# Altium PCB УШЯИ.467444.130_R1.PcbDoc (part 4 of 4)
Units mm, origin at the board's own origin, x right, y up, seen from the top; angles counter-clockwise.
Board outline 280 x 190 mm, 6 copper layers (Top, GND, INT1, INT2, +3.3VB, POWER, Bottom), stack 1.422 mm thick; 240 components, 189 nets, 1128 pads, 331 vias.
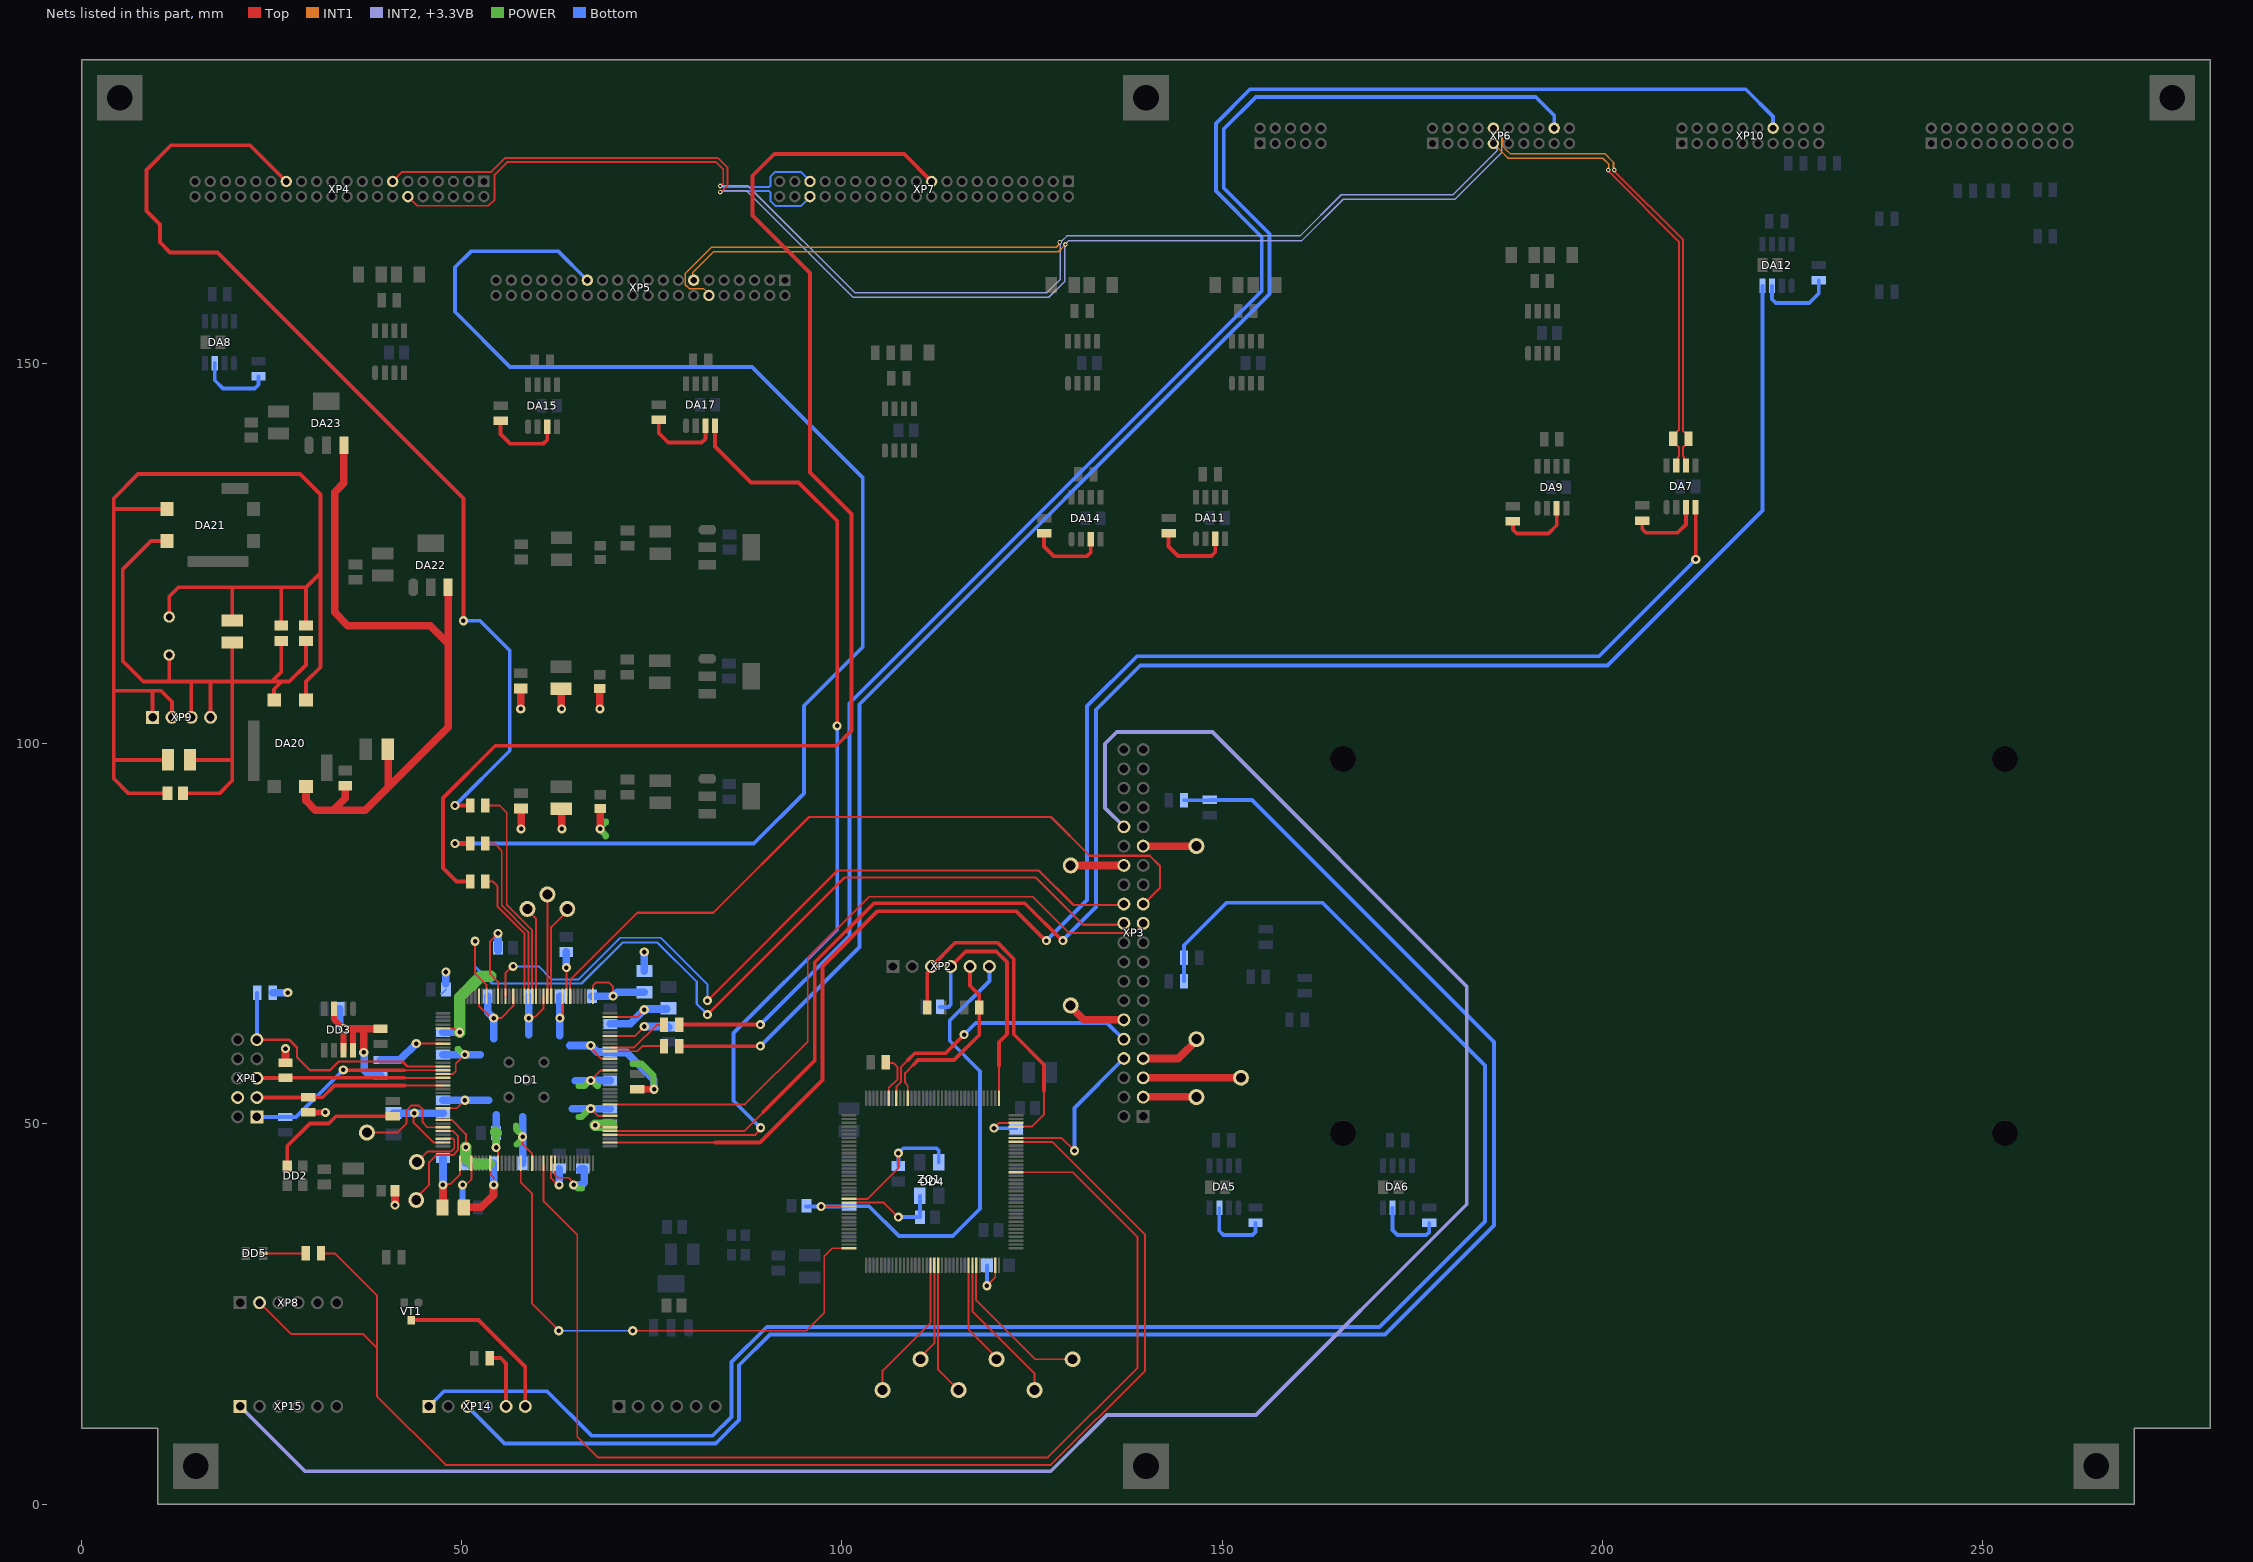
[diagram p8: the nets of this part, all layers, seen from the top]

## Via types
v1: diameter 1.2, hole 0.6, Top to Bottom, tented both sides, 289 vias
v2: diameter 0.6, hole 0.3, Top to Bottom, tented both sides, 42 vias

## Nets (pads, with @x,y where several pads share a name; then routed paths per layer and width w, separated by ;. In a path a pad name is that pad's centre, name@x,y a point inside that pad or via, vN(x,y) a via of type N, cw(c..) or ccw(c..) an arc to the next point about the centre after c; other vN are vias at no path point) (continued)
NetC60_1: C60.1 DD4.24 ZQ1.1 | length 12.9
  Top w0.25: DD4.24@100.924,39.65 105.525,39.65 v1(107.425,37.75)
  Bottom w0.5: v1(107.425,37.75) C60.1@110.25,37.75 110.25,40.525 ZQ1.1@110.225,40.55
NetC61_1: C61.1 DD4.23 ZQ1.3 | length 19.1
  Top w0.25: DD4.23@100.924,40.15 103.375,40.15 107.425,44.2 v1(107.425,46.175)
  Bottom w0.5: C61.1@107.425,44.45 v1(107.425,46.175) 107.443,46.175 108.068,46.8 112.432,46.8 112.725,46.507 ZQ1.3@112.725,44.95
NetC66_+: C66.+ DD4.71 | length 5.8
  Top w0.25: v1(119.075,28.725) 120.162,29.812 DD4.71@120.162,31.412
  Bottom w0.5: v1(119.075,28.725) C66.+@119.075,31.425
NetC67_+: C67.+ DD4.106 | length 6.1
  Top w0.25: v1(120,49.45) 120.7,50.15 DD4.106@122.9,50.15
  Bottom w0.5: v1(120,49.45) C67.+@122.925,49.45
NetC82_1: C82.1 C84.1 C86.+ C87.2 C88.+ C89.+ DA20.1 DA21.1 XP9.1 XP9.2 | length 168.5
  Top w0.5: XP9.1@9.32,103.5 9.32,106.97 9.35,107 ; DA21.1@11.203,130.9 4.2,130.9 ; C87.2@11.3,93.5 6.15,93.5 4.2,95.45 4.2,97.9 4.2,98.1 ; C89.+@11.321,97.9 4.4,97.9 4.2,98.1 ; C86.+@11.5,116.7 11.5,119.4 12.7,120.6 19.8,120.6 ; XP9.2@11.86,103.5 11.86,105.54 10.4,107 9.35,107 ; C88.+@19.8,116.25 19.8,120.6 ; C82.1@26.25,115.563 26.25,120.6 ; DA20.1@29.5,105.8 29.5,108.195 31.4,110.095 31.4,122.5 ; C84.1@29.5,115.563 29.5,120.6 ; 4.2,98.1 4.2,107 ; 4.2,107 4.2,130.9 ; 4.2,107 9.35,107 ; 4.2,130.9 4.2,132.3 7.4,135.5 28.7,135.5 31.4,132.8 31.4,122.5 ; 19.8,120.6 26.25,120.6 ; 26.25,120.6 29.5,120.6 ; 29.5,120.6 31.4,122.5
NetC82_2: C82.2 C84.2 C86.- C87.1 C88.- C89.- DA20.3 DA21.3 XP9.3 XP9.4 | length 100.7
  Top w0.5: DA21.3@11.203,126.7 9.087,126.7 5.4,123.013 5.4,110.878 8.079,108.199 11.597,108.199 ; C86.-@11.5,111.7 11.5,108.296 11.597,108.199 ; C87.1@13.9,93.5 18.1,93.5 19.8,95.2 19.8,97.9 ; C89.-@14.221,97.9 19.8,97.9 ; XP9.3@14.4,103.5 14.4,108.149 ; XP9.4@16.94,103.5 16.94,108.199 ; C88.-@19.8,113.35 19.8,108.199 ; DA20.3@25.3,105.8 25.3,107.2 26.25,108.15 ; C82.2@26.25,113.563 26.25,109.449 25,108.199 ; C84.2@29.5,113.563 29.5,110.4 27.299,108.199 26.25,108.199 25,108.199 ; 11.597,108.199 16.94,108.199 ; 16.94,108.199 19.6,108.199 ; 19.6,108.199 19.8,108.199 ; 19.6,108.199 19.8,107.999 19.8,97.9 ; 19.8,108.199 25,108.199
NetC90_1: C90.1 C91.+ DA20.2 DA22.3 DA23.3 | length 91.9
  Top w1: DA20.2@29.5,94.4 29.5,92.5 30.7,91.3 33.1,91.3 ; DA23.3@34.475,139.3 34.475,134.325 33.275,133.125 33.275,117.3 35.012,115.563 45.837,115.563 48.2,113.2 ; C90.1@34.65,94.5 34.65,92.85 33.1,91.3 ; C91.+@40.293,99.257 40.293,94.293 ; DA22.3@48.2,120.6 48.2,113.2 ; 33.1,91.3 37.3,91.3 40.293,94.293 ; 40.293,94.293 48.2,102.2 48.2,113.2
NetDA5_3: DA5.3 R15.2 | length 9.4
  Bottom w0.5: DA5.3@149.645,38.992 149.645,35.955 150.2,35.4 154.005,35.4 154.405,35.8 R15.2@154.405,37.017
NetDA6_3: DA6.3 R17.2 | length 9.4
  Bottom w0.5: DA6.3@172.435,38.992 172.435,36.035 173.07,35.4 176.875,35.4 177.275,35.8 R17.2@177.275,37.017
NetDA7_3: DA7.3 R19.2 | length 9.8
  Top w0.5: R19.2@205.275,129.375 205.275,128.275 205.775,127.775 209.929,127.775 211.029,128.875 DA7.3@211.029,131.125
NetDA8_3: DA8.3 R20.2 | length 9.8
  Bottom w0.5: DA8.3@17.496,150.1 17.496,147.85 18.596,146.75 22.75,146.75 23.25,147.25 R20.2@23.25,148.35
NetDA9_3: DA9.3 R21.2 | length 9.8
  Top w0.5: R21.2@188.275,129.275 188.275,128.175 188.775,127.675 192.929,127.675 194.029,128.775 DA9.3@194.029,131.025
NetDA11_3: DA11.3 R28.2 | length 10.4
  Top w0.5: R28.2@142.975,127.725 142.975,125.975 144.225,124.725 148.61,124.725 149.11,125.225 DA11.3@149.11,126.975
NetDA12_3: DA12.3 R29.2 | length 10.4
  Bottom w0.5: DA12.3@222.365,160.25 222.365,158.5 222.865,158 227.25,158 228.5,159.25 R29.2@228.5,161
NetDA14_3: DA14.3 R35.2 | length 10.4
  Top w0.5: R35.2@126.6,127.7 126.6,125.95 127.85,124.7 132.235,124.7 132.735,125.2 DA14.3@132.735,126.95
NetDA15_3: DA15.3 R36.2 | length 10.4
  Top w0.5: R36.2@55.1,142.5 55.1,140.75 56.35,139.5 60.735,139.5 61.235,140 DA15.3@61.235,141.75
NetDA17_3: DA17.3 R42.2 | length 10.4
  Top w0.5: R42.2@75.9,142.634 75.9,140.884 77.15,139.634 81.535,139.634 82.035,140.134 DA17.3@82.035,141.884
NetDD1_31: DD1.31 TP5.1 | length 14.7
  Top w0.25: TP5.1@37.505,48.875 41.5,48.875 42.725,50.1 42.725,51.825 43.325,52.425 44.35,52.425 44.825,51.95 44.825,50.225 45.475,49.575 DD1.31@47.512,49.575
NetDD1_32: DD1.32 TP4.1 | length 14.2
  Top w0.25: TP4.1@44,40 44,40.3 45.687,41.987 45.687,44.987 46.619,45.919 48.844,45.919 49.475,46.55 49.475,48.45 48.85,49.075 DD1.32@47.512,49.075
NetDD1_34: DD1.34 TP6.1 | length 8.3
  Top w0.25: TP6.1@44.075,45 45.444,46.369 48.544,46.369 49,46.825 49,47.92 48.854,48.066 47.521,48.066 DD1.34@47.512,48.075
NetDD1_120: DD1.120 TP1.1 | length 12.1
  Top w0.25: DD1.120@61.75,66.813 61.75,75.9 63.375,77.525 63.436,77.525 TP1.1@63.517,77.444 ; TP1.1@63.517,77.8 TP1.1@63.874,78.156
NetDD1_121: DD1.121 TP2.1 | length 13.1
  Top w0.25: TP2.1@61.162,79.888 61.25,79.8 DD1.121@61.25,66.813
NetDD1_124: DD1.124 TP3.1 | length 12
  Top w0.25: TP3.1@58.626,78.3 58.626,78.174 59.75,77.05 DD1.124@59.75,66.813
NetDD2_3: DD2.3 R2.1 | length 18.1
  Top w0.5: DD2.3@27.025,44.487 27.025,47.1 30,50.075 32.485,50.075 33.435,51.025 R2.1@40.9,51.025
NetDD4_54: DD4.54 TP12.1 | length 19
  Top w0.25: TP12.1@105.35,15 105.35,17.55 111.662,23.862 DD4.54@111.662,31.412
NetDD4_55: DD4.55 TP11.1 | length 13.1
  Top w0.25: TP11.1@110.35,19.05 110.35,19.35 112.162,21.162 DD4.55@112.162,31.412
NetDD4_56: DD4.56 TP10.1 | length 17.5
  Top w0.25: DD4.56@112.662,31.412 112.662,17.688 TP10.1@115.35,15
NetDD4_64: DD4.64 TP9.1 | length 13.7
  Top w0.25: DD4.64@116.662,30.742 116.662,22.938 TP9.1@120.796,18.804
NetDD4_65: DD4.65 TP8.1 | length 19.8
  Top w0.25: DD4.65@117.162,31.412 117.162,25.338 125.35,17.15 TP8.1@125.35,15
NetDD4_66: DD4.66 TP7.1 | length 20.5
  Top w0.25: DD4.66@117.662,31.412 117.662,26.838 125.45,19.05 TP7.1@130.35,19.05
NetDD4_138: DD4.138 R10.2 | length 6.4
  Top w0.25: R10.2@105.775,58.1 105.825,58.05 106.75,58.05 107.325,57.475 107.325,55.9 106.162,54.737 DD4.138@106.162,53.388
NetDD5_5: DD5.5 R50.2 | length 5.6
  Top w0.3: DD5.5@23.85,32.975 R50.2@29.475,32.975
NetTP13_1: TP13.1 XP3.3 | length 6.9
  Top w1: XP3.3@139.692,53.6 TP13.1@146.568,53.6
NetTP14_1: TP14.1 XP3.5 | length 12.9
  Top w1: XP3.5@139.78,56.1 TP14.1@152.65,56.1
NetTP15_1: TP15.1 XP3.7 | length 8.3
  Top w1: XP3.7@139.577,58.618 144.26,58.618 TP15.1@146.8,61.158
NetTP16_1: TP16.1 XP3.29 | length 7.2
  Top w1: XP3.29@139.655,86.556 TP16.1@146.825,86.556
NetTP17_1: TP17.1 XP3.12 | length 7.7
  Top w1: TP17.1@130.09,65.435 131.827,63.698 XP3.12@137.09,63.698
NetTP18_1: TP18.1 XP3.28 | length 7.1
  Top w1: TP18.1@130.025,83.953 130.072,84 XP3.28@137.09,84
NRST: C57.2 DD4.25 R14.2 XP2.6 | length 65.3
  Top w0.25: v1(97.25,39.15) DD4.25@100.924,39.15
  Bottom w0.5: C57.2@95.275,39.15 v1(97.25,39.15) 97.263,39.162 R14.2@100.813,39.162 ; R14.2@100.95,39.175 103.575,39.175 107.5,35.25 114.575,35.25 118.175,38.85 118.175,56.95 114.175,60.95 114.175,63.6 119.395,68.82 XP2.6@119.395,70.725
NSTAT: DD1.9 R6.1 | length 9.1
  Top w0.25: v1(44,60.575) DD1.9@47.512,60.575
  Bottom w1: R6.1@39.3,58.425 41.85,58.425 v1(44,60.575)
OVLB: R69.1 XP4.27 | length 135
  Top w0.5: XP4.27@26.9,174 22.15,178.75 11.75,178.75 8.5,175.5 8.5,170.1 10.275,168.325 10.275,166 11.625,164.65 17.85,164.65 50.2,132.3 v1(50.2,116.2) ; v1(49.098,91.9) R69.1@51.098,91.9
  Bottom w0.5: v1(49.098,91.9) 56.3,99.102 56.3,112.3 52.4,116.2 v1(50.2,116.2)
OVLBR: DD1.125 R69.2 | length 28.7
  Top w0.25: R69.2@53.098,91.9 54.975,91.9 55.9,90.975 55.9,78.825 59.25,75.475 DD1.125@59.25,66.813
OVLI_1: R71.1 XP6.18 | length 209.5
  Top w0.5: R71.1@78.6,60.239 v1(89.275,60.239)
  Bottom w0.5: v1(89.275,60.239) 102.3,73.264 102.3,105.225 156.25,159.175 156.25,167.125 150.225,173.15 150.225,180.875 154.45,185.1 191.275,185.1 193.7,182.675 XP6.18@193.7,181
OVLI_1R: DD1.98 R71.2 | length 7.4
  Top w0.25: DD1.98@69.488,59.575 73.078,59.575 73.743,60.239 R71.2@76.6,60.239
OVLI_2: R73.1 XP10.14 | length 237.3
  Top w0.5: R73.1@78.502,63 78.577,63.075 v1(89.275,63.075)
  Bottom w0.5: v1(89.275,63.075) 100.975,74.775 100.975,105.35 155.225,159.6 155.225,166.7 149.2,172.725 149.2,181.625 153.7,186.125 218.9,186.125 222.5,182.525 XP10.14@222.5,181
OVLI_2R: DD1.99 R73.2 | length 8.4
  Top w0.25: DD1.99@69.488,60.075 72.675,60.075 75.621,63.021 76.546,63.021 R73.2@76.6,63.075
OVLP: R70.1 XP5.27 | length 183.7
  Top w0.5: v1(49.1,86.9) R70.1@51.1,86.9
  Bottom w0.5: v1(49.1,86.9) 88.4,86.9 95,93.5 95,105.025 102.75,112.775 102.75,135 88.15,149.6 56.35,149.6 49.1,156.85 49.1,162.7 51.2,164.8 62.7,164.8 XP5.27@66.5,161
OVLPR: DD1.126 R70.2 | length 23.1
  Top w0.25: R70.2@53.1,86.9 54.3,86.9 55.25,85.95 55.25,78.757 58.75,75.257 DD1.126@58.75,66.813
OVLW: R72.1 XP7.19 | length 175.7
  Top w0.5: R72.1@51.231,81.9 49.3,81.9 47.512,83.688 47.512,92.864 54.398,99.75 99.25,99.75 101.25,101.75 101.25,130.25 95.8,135.7 95.8,161.95 88.25,169.5 88.25,174.75 91.1,177.6 108.2,177.6 XP7.19@111.8,174
OVLWR: DD1.127 R72.2 | length 17.8
  Top w0.25: R72.2@53.098,81.9 54.1,81.9 54.7,81.3 54.7,78.6 58.25,75.05 DD1.127@58.25,66.813
PULSB: DA17.4 DD1.76 | length 130.2
  Top w0.25: DD1.76@69.488,48.575 88.619,48.575 89.3,49.256 v1(89.3,49.5)
  Top w0.5: DA17.4@83.305,141.884 83.305,139.12 88.025,134.4 94.3,134.4 99.375,129.325 v1(99.375,102.375)
  Bottom w0.5: v1(89.3,49.5) 85.75,53.05 85.75,61.95 99.375,75.575 v1(99.375,102.375)
PULSC: DA12.4 DD1.77 | length 241.9
  Top w0.25: DD1.77@69.488,49.075 87.15,49.075 89.65,51.575
  Top w0.5: 89.65,51.575 96.425,58.35 96.425,71.275 104.2,79.05 124.05,79.05 128.975,74.125 v1(129.075,74.125)
  Bottom w0.5: v1(129.075,74.125) 129.075,74.2 133.425,78.55 133.425,104.488 139.237,110.3 200.7,110.3 221.095,130.695 DA12.4@221.095,160.25
RUN_ADC: DA7.4 DD1.74 | length 208.4
  Top w0.25: DD1.74@69.488,47.575 83.375,47.575
  Top w0.5: 83.375,47.575 89.2,47.575 97.425,55.8 97.425,70.725 104.7,78 122.9,78 126.775,74.125 v1(126.9,74.125) ; DA7.4@212.299,131.125 212.312,131.112 212.312,124.288 v1(212.325,124.275)
  Bottom w0.5: v1(126.9,74.125) 132.25,79.475 132.25,104.975 138.8,111.525 199.575,111.525 v1(212.325,124.275)
RUN_n: DA7.7 R24.1 XP4.12 XP5.12 XP6.9 XP7.35 | length 299.8
  Top w0.25: XP4.12@42.9,172 44.1,170.8 53.478,170.8 54.295,171.617 54.295,174.89 55.945,176.539 83.461,176.539 84.383,175.617 84.383,173.783 v2(84,173.4) ; v2(200.8,175.5) 200.8,175.405 201.21,174.995 201.21,174.978 210.1,166.088 210.1,141.3 209.375,140.575 R24.1@209.375,140.175 209.375,139.775 210.1,139.05 210.1,137.875 209.994,137.769 209.994,136.861 DA7.7@209.759,136.625
  INT1 w0.2: XP5.12@82.5,159 82.5,159.2 81.8,159.9 79.9,159.9 79.4,160.4 79.4,161.9 79.893,162.393 80.499,162.999 82.674,165.174 82.85,165.35 128.201,165.35 128.518,165.667 128.518,165.741 128.651,165.874 v2(128.651,165.982) ; XP6.9@185.7,179 187.291,177.409 187.643,177.057 200.091,177.057 200.9,176.249 200.9,175.817 200.877,175.794 200.877,175.577 v2(200.8,175.5)
  INT2, +3.3VB w0.2: v2(84,173.4) 87.65,173.4 88.001,173.049 101.7,159.35 126.969,159.35 128.738,161.119 128.738,165.665 128.728,165.675 128.728,165.906 v2(128.651,165.982) 128.76,165.982 128.93,166.152 129.603,166.825 160.271,166.825 165.696,172.25 180.4,172.25 186.2,178.05 186.2,178.233 185.7,178.733 XP6.9@185.7,179
  Bottom w0.25: v2(84,173.4) 84.067,173.333 84.263,173.333 84.321,173.275 90.432,173.275 90.579,173.421 90.579,174.604 91.225,175.25 94.55,175.25 XP7.35@95.8,174
RUN_p: DA7.6 R24.2 XP4.13 XP5.13 XP6.10 XP7.36 | length 300.8
  Top w0.25: XP4.13@40.9,174 42.15,175.25 53.878,175.25 55.717,177.089 83.689,177.089 84.933,175.844 84.933,173.45 84.084,172.6 v2(84,172.6) ; v2(201.6,175.5) 201.6,175.405 201.76,175.245 201.76,175.206 210.65,166.316 210.65,165.15 210.65,141.146 210.796,141 210.95,141 211.375,140.575 R24.2@211.375,140.175 211.375,139.775 210.65,139.05 210.65,137.85 210.762,137.738 210.762,136.892 DA7.6@211.029,136.625
  INT1 w0.2: XP5.13@80.5,161 80.4,161.1 80.4,162.051 83.099,164.75 128.45,164.75 v2(129.4,165.7) ; XP6.10@185.7,181 185.7,180.919 186.95,179.669 186.95,178.599 187.467,178.081 187.891,177.657 200.34,177.657 201.5,176.497 201.5,175.817 201.523,175.794 201.523,175.577 v2(201.6,175.5)
  INT2, +3.3VB w0.2: v2(84,172.6) 84.108,172.6 84.308,172.8 87.401,172.8 101.451,158.75 127.218,158.75 129.338,160.871 129.338,165.638 v2(129.4,165.7) ; v2@129.4,165.774 129.851,166.225 160.519,166.225 165.944,171.65 180.649,171.65 186.8,177.801 186.8,179.819 185.7,180.919 XP6.10@185.7,181
  Bottom w0.25: v2(84,172.6) 84.067,172.667 84.263,172.667 84.321,172.725 90.432,172.725 90.579,172.579 90.579,171.471 91.3,170.75 94.55,170.75 XP7.36@95.8,172
RX: DD4.136 XP3.10 | length 37
  Top w0.25: DD4.136@107.162,53.388 107.162,54.925 107.775,55.538 107.775,57.5 108.675,58.4
  Top w0.5: 108.675,58.4 109.575,59.3 113.625,59.3 v1(116.075,61.75)
  Bottom w0.5: v1(116.075,61.75) 117.6,63.275 134.89,63.275 XP3.10@137.09,61.075
SPI_CLK: DD1.115 XP3.23 | length 97.3
  Top w0.25: DD1.115@64.25,66.813 64.25,68.95 73.1,77.8
  Top w0.3: 73.1,77.8 83.075,77.8 95.65,90.375 127.5,90.375 132.6,85.275 140.5,85.275 141.85,83.925 141.85,81.073 XP3.23@139.577,78.8
SPI_MISO: DD1.84 XP3.21 | length 90.4
  Top w0.25: DD1.84@69.488,52.575 87.226,52.575 95.5,60.849 95.5,71.8 103.6,79.9 125.125,79.9 129.9,75.125 138.357,75.125 XP3.21@139.63,76.398
SPICS: DD1.132 XP3.24 | length 101.6
  Top w0.25: DD1.132@55.75,66.813 55.75,69.875 56.6,70.725 v1(56.75,70.725)
  Top w0.3: v1(82.3,66.225) 99.425,83.35 125.9,83.35 130.45,78.8 XP3.24@137.275,78.8
  Bottom w0.25: v1(56.75,70.725) 60.084,70.725 61.809,69 65.337,69 70.837,74.5 76.181,74.5 82.3,68.381 v1(82.3,66.225)
ST_EXT: XP3.32 XP15.1 | length 282.1
  INT2, +3.3VB w0.5: XP15.1@20.84,12.85 29.365,4.325 127.475,4.325 134.85,11.7 154.463,11.7 182.2,39.437 182.2,68.1 148.75,101.55 136.15,101.55 134.625,100.025 134.625,91.563 XP3.32@137.09,89.098
ST_TB: DD1.53 DD4.36 | length 71
  Top w0.25: DD1.53@57.75,44.837 57.75,42.35 59.25,40.85 59.25,26.35 62.75,22.85 v1(62.75,22.8) ; v1(72.475,22.8) 95.3,22.8 97.675,25.175 97.675,32.625 98.7,33.65 DD4.36@100.924,33.65
  Bottom w0.25: v1@62.85,22.8 v1(72.475,22.8)
START: R55.2 R58.1 XP14.1 | length 234.3
  Bottom w0.5: XP14.1@45.65,12.85 47.65,14.85 61.2,14.85 67.05,9 83.011,9 85.475,11.464 85.475,18.675 90.1,23.3 149.642,23.3 ; R58.1@145,68.778 145.018,68.795 145.018,71.883 145.018,73.517 150.6,79.1 163.2,79.1 184.6,57.7 184.6,37.164 170.736,23.3 149.642,23.3 ; 149.513,23.3 149.642,23.3
STOP: R56.2 R59.1 XP14.3 | length 231.8
  Bottom w0.5: XP14.3@50.535,13.045 XP14.3@50.73,12.85 55.605,7.975 83.4,7.975 86.475,11.05 86.475,18.261 90.514,22.3 149.642,22.3 ; R59.1@145,92.6 147.516,92.6 148.362,92.6 R56.2@148.4,92.638 153.962,92.638 185.8,60.8 185.8,36.667 171.433,22.3 149.642,22.3 ; 149.446,22.3 149.642,22.3
Stop_TB: DD1.137 XP3.22 | length 115.4
  Top w0.25: v1(51.738,74.043) 51.738,69.787 53.25,68.275 DD1.137@53.25,66.813
  Top w0.3: v1(82.3,64.4) 100.325,82.425 125.5,82.425 131.7,76.225 XP3.22@137.09,76.225
  Bottom w0.3: v1(51.738,74.043) 51.738,70.717 53.979,68.475 65.75,68.475 71.156,73.881 75.719,73.881 80.9,68.7 80.9,65.8 v1(82.3,64.4)
SWCLK: DD4.109 R11.2 XP2.4 | length 33.7
  Top w0.25: DD4.109@120.662,53.388 120.662,57.662
  Top w0.5: XP2.4@114.315,70.725 116.29,72.7 120.3,72.7 121.7,71.3 121.7,61.8 120.662,60.762 120.662,57.662
  Bottom w0.5: R11.2@112.9,65.4 114,65.4 114.315,65.715 XP2.4@114.315,70.725
SWDIO: DD4.105 R13.2 XP2.3 | length 45.1
  Top w0.25: DD4.105@122.9,49.65 124.95,49.65 126.6,51.3 126.6,54.4
  Top w0.5: R13.2@111.225,65.325 111.225,69.85 111.775,70.4 XP2.3@111.775,70.725 114.906,73.856 120.444,73.856 122.6,71.7 122.6,61.8 126.6,57.8 126.6,54.4
TCK1: DD1.16 R7.1 XP1.1 | length 27
  Top w0.25: 42.4,57.075 DD1.16@47.512,57.075
  Top w0.5: v1(34.4,57.125) 34.45,57.075 42.4,57.075
  Bottom w0.5: XP1.1@23.056,50.925 28.2,50.925 31.633,54.358 v1(34.4,57.125)
TDI: DD1.15 R3.1 XP1.9 | length 33.8
  Top w0.25: 42.85,57.575 DD1.15@47.512,57.575
  Top w0.3: XP1.9@23.04,61.101 27.274,61.101 28.3,60.075 28.3,58.795 30.02,57.075 32.665,57.075 33.815,58.225 42.2,58.225 42.85,57.575
  Bottom w0.25: R3.1@23.04,67.215 R3.1@23.1,67.275
  Bottom w0.5: XP1.9@23.04,61.101 R3.1@23.04,67.215
TDO1: DD1.20 R4.1 XP1.3 | length 25.1
  Top w0.25: 42.45,55.075 DD1.20@47.512,55.075
  Top w0.5: XP1.3@23.04,53.481 23.062,53.503 29.778,53.503 R4.1@29.8,53.525 31.7,53.525 33.25,55.075 42.45,55.075
TMS1: DD1.18 R5.1 XP1.5 | length 24.5
  Top w0.25: 42.4,56.075 DD1.18@47.512,56.075
  Top w0.5: XP1.5@23.04,56.021 23.067,56.048 26.773,56.048 R5.1@26.8,56.075 42.4,56.075
TRACEWO: DD4.133 R12.2 XP2.5 | length 24.8
  Top w0.25: DD4.133@108.662,53.388 108.662,55.063 108.3,55.425 108.3,56.688 109.4,57.788
  Top w0.5: 109.4,57.788 110.012,58.4 114.725,58.4 118.075,61.75 R12.2@118.075,65.325 118.075,66.975 116.855,68.195 XP2.5@116.855,70.725
TX: DD4.102 XP3.8 | length 23.2
  Top w0.25: DD4.102@122.9,48.15 128.921,48.15 v1(130.596,46.475)
  Bottom w0.5: v1(130.596,46.475) 130.596,52.124 137.05,58.578 XP3.8@137.05,58.65
VBUS: DD4.101 R50.1 XP8.2 | length 191.3
  Top w0.25: XP8.2@22.96,26.92 27.53,22.35 37,22.35 38.85,20.5 ; R50.1@31.475,32.975 33.25,32.975 38.85,27.375 38.85,20.5 ; DD4.101@122.9,47.65 127.675,47.65 139.875,35.45 139.875,17.525 127.5,5.15 47.85,5.15 38.85,14.15 38.85,20.5
VCC_PL1: C8.2 DD1.37 L4.2 | length 10.7
  Top w0.25: L4.2@47.462,39.025 L4.2@47.512,39.075 ; v1@47.512,41.549 v1@47.781,41.818 ; v1(47.512,42) 47.612,42.1 48.5,42.1 49.75,43.35 DD1.37@49.75,44.837
  Top w1: L4.2@47.512,39.075 v1@47.512,41.549
  Bottom w1: v1(47.512,42) C8.2@47.512,45.525
VCC_PL2: C9.2 DD1.109 L5.2 | length 12.7
  Top w0.25: DD1.109@67.25,66.813 67.25,68.175 67.7,68.625 69.342,68.625 69.9,68.067 v1(69.9,66.825)
  Bottom w1: C9.2@67.1,66.825 v1(69.9,66.825) ; v1@69.938,66.863 69.992,66.863 70.454,67.325 L5.2@74,67.325
VCCA1: C6.2 DD1.35 L1.2 | length 12.8
  Top w0.25: v1(43.75,51.425) 43.625,51.3 43.625,50.2 46.25,47.575 DD1.35@47.512,47.575
  Bottom w1: L1.2@41,51.425 v1(43.75,51.425) C6.2@47.512,51.425
VCCA2: C7.2 DD1.107 L3.2 | length 13.5
  Top w0.25: DD1.107@69.488,64.075 73.05,64.075 v1(74,65.025)
  Bottom w0.25: v1(74,65.025) v1@74.1,65.125 ; L3.2@76.937,65.125 L3.2@77.2,65.388
  Bottom w1: C7.2@69.5,63.175 72.15,63.175 v1(74,65.025) ; v1@74.1,65.125 L3.2@76.937,65.125
VCCIO: C4.2 C5.2 C17.2 C18.2 C19.2 C20.2 C21.2 C22.2 C23.2 C24.2 C39.2 C40.+ C41.2 C42.2 C43.2 C44.2 DD1.17 DD1.26 DD1.40 DD1.47 DD1.56 DD1.62 DD1.81 DD1.93 DD1.96 DD1.117 DD1.122 DD1.130 DD1.139 DD3.3 DD3.7 DD3.8 L2.2 L8.1 R3.2 R4.2 R5.2 R6.2 R8.2 R9.2 XP1.4 | length 181.3
  Top w0.25: DD1.26@47.512,52.075 49.35,52.075 v1(50.4,53.125) ; DD1.17@47.512,56.575 48.825,56.575 49.2,56.95 49.2,57.925 v1(50.4,59.125) ; v1@50.1,41.549 51.25,42.699 DD1.40@51.25,44.837 ; DD1.139@52.25,66.813 52.25,65.575 53.718,64.107 54.018,64.107 v1(54.2,63.925) 55.171,63.925 56.775,65.529 56.775,66.788 DD1.130@56.75,66.813 ; v1(54.5,46.913) 54.5,46.655 54.75,46.405 DD1.47@54.75,44.837 ; v1@58,48.525 v1(58,48.325) 58,47.325 59.25,46.075 DD1.56@59.25,44.837 ; v1@58.8,63.821 59.085,64.107 59.657,64.107 60.725,65.175 60.725,65.815 60.725,66.788 DD1.122@60.75,66.813 ; DD1.62@62.25,44.837 62.25,43.325 62.65,42.925 64.05,42.925 64.398,42.577 64.398,42.559 64.7,42.257 v1(64.7,42) ; v1@62.718,64.107 v1(62.9,63.925) 62.9,64.182 63.25,64.532 DD1.117@63.25,66.813 ; v1(66.95,52.025) 67.9,51.075 DD1.81@69.488,51.075 ; v1(66.95,55.725) 68.275,57.05 69.463,57.05 DD1.93@69.488,57.075 ; v1(66.95,60.325) 67.132,60.143 67.132,59.822 68.353,58.6 69.463,58.6 DD1.96@69.488,58.575
  Top w0.8: R4.2@29.8,51.525 v1(32.05,51.525) ; DD3.3@33.165,65.175 33.165,63.795 v1(34.435,62.525) DD3.7@34.435,59.675 ; DD3.8@35.705,59.675 35.705,62.525 ; R9.2@73.05,54.575 v1(75.3,54.575)
  Top w1: R5.2@26.8,58.075 v1(26.8,59.925) ; v1(34.435,62.525) 35.705,62.525 37.1,62.525 ; v1(37.1,59.425) 37.1,62.525 ; R8.2@38.8,62.525 37.1,62.525 ; v1(41.2,39.325) L8.1@41.2,41.225 ; v1(57.79,88.816) C39.2@57.79,91.516 ; v1(63.164,88.816) 63.127,88.853 63.127,91.404 C40.+@63.164,91.441 ; v1(68.19,88.816) L2.2@68.19,91.516
  POWER w0.8: 49.44,59.862 49.555,59.862 50.292,59.125 v1(50.4,59.125) ; 57.1,49.767 57.1,49.333 58,48.433 58,48.217 57.8,48.017 57.8,47.921 57.202,47.323 ; v1(64.7,42) 64.808,42 65.271,41.537 65.818,41.537 ; 65.342,54.986 66.103,54.986 66.842,55.725 v1(66.95,55.725) 67.058,55.725 67.795,54.988 67.91,54.988 ; 65.347,50.91 65.727,50.91 66.842,52.025 v1(66.95,52.025) ; 68.927,87.856 68.927,87.971 68.19,88.708 v1(68.19,88.816) 68.19,88.924 68.927,89.661 68.927,89.776 ; 72.421,57.925 73.642,57.925 75.223,56.343 75.223,54.652 v1(75.3,54.575)
  POWER w1: v1(54.5,46.913) 54.5,48.862
  POWER w1.5: 54.437,48.925 54.5,48.862
  Bottom w0.25: 47.249,67.162 47.375,67.162 47.9,67.687 C4.2@47.9,67.7 ; C4.2@47.9,68.475 47.924,68.451 C4.2@48,68.451 ; C24.2@69.454,59.471 C24.2@69.5,59.425
  Bottom w0.8: C19.2@50.1,39.025 v1@50.1,41.943
  Bottom w1: R3.2@25.1,67.275 v1(27.1,67.275) ; C44.2@33.9,65.175 33.9,63.114 34.435,62.579 v1(34.435,62.525) ; v1(37.1,59.425) v1@37.138,59.387 ; v1@37.138,59.087 37.138,57.056 37.724,56.47 39.255,56.47 R6.2@39.3,56.425 ; C17.2@47.512,53.125 v1(50.4,53.125) 53.554,53.125 ; C20.2@47.512,59.125 v1(50.4,59.125) 52.4,59.125 ; C4.2@47.9,68.475 v1(47.9,70) ; C21.2@53.4,66.825 53.4,64.725 v1(54.2,63.925) 54.2,61.195 ; v1(54.5,46.913) C18.2@54.5,48.825 54.5,51.225 ; C41.2@58,44.825 v1(58,48.325) 58,50.931 ; 58.8,61.755 v1(58.8,63.925) C22.2@58.8,66.825 ; 62.9,61.63 v1(62.9,63.925) C23.2@62.9,66.825 ; 64.222,60.325 v1(66.95,60.325) 67.804,59.471 C24.2@69.454,59.471 ; 64.55,52.025 v1(66.95,52.025) C43.2@69.488,52.025 ; v1(64.7,42) 65.85,42 66.1,42.25 C5.2@66.1,44.125 ; 64.9,55.687 66.912,55.687 v1(66.95,55.725) C42.2@69.5,55.725 ; C5.2@65.527,43.975 65.677,44.125 C5.2@65.9,44.125 ; C24.2@69.5,59.425 69.877,59.425 69.9,59.402 71.698,59.402 75.262,55.838 75.262,54.613 v1(75.3,54.575)
  other v1: 50.1,42
VCINT: C29.2 C30.+ C31.2 C32.2 C33.2 C34.2 C35.2 C36.2 C37.2 C38.2 DD1.5 DD1.29 DD1.45 DD1.61 DD1.78 DD1.102 DD1.116 DD1.134 L4.1 L5.1 L7.2 | length 86.9
  Top w0.25: DD1.29@47.512,50.575 47.537,50.55 48.647,50.55 50.525,48.672 v1(50.525,46.967) ; DD1.5@47.512,62.575 48.943,62.575 49.443,62.075 v1(49.7,62.075) ; DD1.45@53.75,44.837 53.75,43.375 54.2,42.925 v1(54.2,42) ; v1@54.099,42.326 54.099,41.65 v1@54.2,41.549 ; DD1.134@54.75,66.813 54.75,68.725 53.718,69.757 53.718,74.043 v1(54.75,75.075) ; DD1.61@61.75,44.837 61.75,42.875 62.625,42 v1(62.8,42) ; DD1.116@63.75,66.813 v1(63.75,70.575) ; v1(67.55,49.825) 67.807,49.825 68.057,49.575 DD1.78@69.488,49.575 ; DD1.102@69.488,61.575 72.75,61.575 v1(74,62.825)
  Top w1: L4.1@50.262,39.025 52.562,39.025 54.162,40.625 54.162,41.511 v1@54.2,41.549 ; v1(57.75,104.6) C29.2@57.75,107.3 ; v1(63.124,104.6) 63.087,104.637 63.087,107.188 C30.+@63.124,107.225 ; v1(68.15,104.6) L7.2@68.15,107.3
  POWER w1.5: v1(49.7,62.075) 49.7,66.65 52.489,69.439 53.796,69.439 53.82,69.463 ; v1(50.525,46.967) 50.525,45.536 51.324,44.738 53.634,44.738 ; v1(67.55,49.825) 69.692,49.825 69.75,49.767
  Bottom w1: C35.2@47.512,62.075 v1(49.7,62.075) ; C34.2@50.5,44.825 50.512,44.838 50.512,46.955 v1(50.525,46.967) ; v1(54.2,42) C31.2@54.2,44.825 ; C36.2@54.75,72.825 v1(54.75,75.075) ; v1(62.8,42) C33.2@62.8,44.125 ; v1(63.75,70.575) C37.2@63.75,72.625 ; v1(67.55,49.825) C32.2@69.5,49.825 ; v1(74,62.825) 77.1,62.825 C38.2@77.2,62.725 ; L5.1@74,70.125 v1(74,72.625)
VD+: R60.1 XP14.5 | length 8.1
  Top w0.5: R60.1@53.65,19.2 55.125,19.2 55.81,18.515 XP14.5@55.81,12.85
VD-: VT1.D XP14.6 | length 22.7
  Top w0.5: VT1.D@43.35,24.2 52.175,24.2 58.35,18.025 XP14.6@58.35,12.85
WR_RG: DD1.59 DD4.93 | length 154.2
  Top w0.25: DD1.59@60.75,44.837 60.75,39.825 65.175,35.4 65.175,8.868 67.893,6.15 127.107,6.15 138.9,17.943 138.9,35.103 130.353,43.65 DD4.93@122.9,43.65
pads on no net: A1.0 DA5.1 DA5.2 DA6.1 DA6.2 DA7.1 DA7.2 DA8.1 DA8.2 DA9.1 DA9.2 DA10.3 DA10.4 DA11.1 DA11.2 DA12.1 DA12.2 DA13.3 DA13.4 DA14.1 DA14.2 DA15.1 DA15.2 DA16.3 DA16.4 DA17.1 DA17.2 DA18.3 DA18.4 DA19.3 DA19.4 DD1.1 DD1.2 DD1.3 DD1.4 DD1.7 DD1.10 DD1.11 DD1.22 DD1.23 DD1.28 DD1.30 DD1.33 DD1.38 DD1.39 DD1.42 DD1.43 DD1.44 DD1.46 DD1.50 DD1.51 DD1.52 DD1.54 DD1.55 DD1.64 DD1.65 DD1.66 DD1.67 DD1.68 DD1.79 DD1.85 DD1.86 DD1.87 DD1.88 DD1.89 DD1.90 DD1.91 DD1.100 DD1.101 DD1.103 DD1.105 DD1.106 DD1.112 DD1.113 DD1.114 DD1.128 DD1.129 DD1.135 DD1.141 DD1.142 DD1.143 DD1.144 DD2.1 DD4.1 DD4.2 DD4.3 DD4.4 DD4.5 DD4.7 DD4.8 DD4.13 DD4.14 DD4.18 DD4.32 DD4.34 DD4.35 DD4.37 DD4.40 DD4.41 DD4.42 DD4.43 DD4.45 DD4.46 DD4.47 DD4.48 DD4.53 DD4.58 DD4.59 DD4.60 DD4.63 DD4.67 DD4.68 DD4.69 DD4.70 DD4.73 DD4.74 DD4.75 DD4.79 DD4.85 DD4.86 DD4.87 DD4.88 DD4.96 DD4.98 DD4.99 DD4.100 DD4.110 DD4.111 DD4.112 DD4.113 DD4.114 DD4.115 DD4.116 DD4.117 DD4.118 DD4.119 DD4.122 DD4.123 DD4.124 DD4.125 DD4.126 DD4.127 DD4.128 DD4.129 DD4.132 DD4.134 DD4.135 DD4.137 DD4.139 DD4.141 DD4.142 XP1.6 XP1.7 XP1.8 XP3.1 XP3.2 XP3.4 XP3.17 XP3.19 XP3.38 XP3.40 XP4.31 XP4.32 XP4.33 XP4.34 XP4.35 XP4.36 XP4.37 XP4.38 XP4.39 XP4.40 XP5.22 XP5.24 XP5.25 XP5.29 XP5.31 XP5.32 XP5.33 XP5.34 XP5.35 XP5.36 XP5.37 XP5.38 XP5.39 XP5.40 XP7.21 XP7.22 XP7.23 XP7.24 XP7.25 XP7.39 XP7.40 XP11.4 XP12.14 XP12.16 XP12.17 XP12.18 XP12.19 XP12.20 ZQ1.2 ZQ1.4

## Polygon pours and split planes (outlines as drawn)
GND on Bottom "GND2" (hatched 45Degree grid 0.5 track 0.2, remove dead copper, pour order 30): -0.05,0 43.8,0 43.8,0.113 125.575,0.113 278.65,0.113 278.65,166.987 278.65,180.762 271.375,180.762 269.2,178.587 269.2,166.987 232.05,166.987 232.05,139.362 200.35,107.662 138.9,107.662 125.575,94.337 125.575,26.437 43.8,26.437 43.8,69.675 46.575,72.45 118.137,72.45 118.137,99.862 131.5,113.225 199.55,113.225 220.175,133.85 220.175,180.15 140.05,180.15 140.05,190 0.2,189.825 -0.05,189.575
VCCIO on Bottom "VCCIO" (solid, remove dead copper, pour order 0): 53.654,62.579 63.696,62.579 cw(c63.696,60.775) 65.5,60.775 65.5,52.425 cw(c63.4,52.425) 63.4,50.325 53.8,50.325 cw(c53.8,52.425) 51.7,52.425 51.7,60.625 cw(c53.654,60.625)
+5V on POWER "+5V" (solid, remove dead copper, pour order 2): 29.725,1.022 66.15,1.022 280,1.022 280,138.5 280,184 251.6,184 250.5,182.9 250.5,177.352 253.602,174.25 264.975,174.25 199.5,174.25 199.5,184.416 164.582,184.416 162.5,182.334 162.5,156.2 20.325,156.2 17.3,153.175 17.3,134.375 22.925,128.75 44.475,128.75 47.5,131.775 50.725,135 58.725,135 64.175,135 66.692,135 70.067,131.625 76.672,131.625 78.8,129.497 78.8,89.865 83.115,85.55 123.8,85.55 129,80.35 129,26.075 124.125,21.2 90.125,21.2 83.4,27.925 74.327,27.925 62.327,15.925 32.4,15.925 29.725,13.25
VCINT on POWER "VCINT" (solid, remove dead copper, pour order 26): 40.847,115.347 40.847,100.153 43.3,97.7 67.8,97.7 70.4,95.1 70.4,83.4 67.8,80.8 54,80.8 52.1,78.9 52.1,68.7 68.492,68.7 70.4,66.792 70.4,62.721 72.421,60.7 76.492,60.7 78.3,58.892 78.3,52.48 76.395,50.575 68.7,50.575 68.7,49.075 70.8,46.975 70.8,41.386 69.514,40.1 63.9,40.1 63.2,40.8 63.2,43.975 61.675,45.5 55.825,45.5 52.5,45.5 52.5,36.5 54.85,34.15 77.225,34.15 79.558,36.483 79.558,40.758 82.168,43.368 88.777,43.368 91.3,45.892 91.3,64.894 87.694,68.5 78.5,68.5 77.8,69.2 77.8,115.3 75.2,117.9 43.4,117.9
VCCIO on POWER "VCCIO" (solid, remove dead copper, pour order 10): 17.5,96.5 70.4,96.5 70.4,81.8 54.35,81.8 54.35,69.355 70.4,69.343 70.4,62.721 70.61,62.512 78.6,62.512 78.6,40.831 51.341,40.831 51.341,37.188 50.403,36.25 39.454,36.25 38.5,37.204 38.5,40.5 41.975,43.975 43,45 43,48.833 41.833,50 17.441,50 14.5,52.941 14.5,93.5
+3.3VC on POWER "+3.3VC" (solid, remove dead copper, pour order 9): 278.925,190 153.5,190 1.1,190 1.1,157.124 1.1,135.05 5.875,130.275 12.2,130.275 16.15,134.225 16.15,149.375 16.15,154.525 18.749,157.124 160.674,157.124 164.3,160.75 164.3,182.15 166.65,184.5 194.75,184.5 197.25,182 197.25,176.6 199.4,174.45 227,174.45 275.6,174.45 278.925,177.775
+2.5V on POWER "+2.5V" (solid, remove dead copper, pour order 11): 77.8,129.099 77.8,121.225 75.525,118.95 43.891,118.95 43.891,104.191 32.761,93.061 13.5,93.061 13.5,72.525 13.5,53.875 18.4,48.975 44.429,48.975 44.429,72.525 73.25,72.525 73.25,69.3 78.8,69.3 78.8,70.937 80.388,72.525 97.141,72.525 98.8,70.866 98.8,43.042 94.658,38.9 88.75,38.9 86.425,36.575 86.425,31.75 83.625,28.95 73.925,28.95 73.925,0 1.15,0 1.15,124.339 5.947,129.116 44.429,128.954 49.925,134.45 65.775,134.45 69.6,130.625 76.274,130.625
DVCST on POWER "DVCST" (solid, remove dead copper, pour order 18): 102.925,84.475 124.4,84.475 128.049,80.826 128.049,25.549 124.15,21.65 90.772,21.65 87,25.422 87,36.322 88.878,38.2 95.375,38.2 99.75,42.575 99.75,81.3
GND on Top "GND2" (hatched 45Degree grid 0.5 track 0.2, remove dead copper, pour order 31): 125.418,33.326 125.45,95.175 96.85,95.175 96.85,132.95 42.7,132.95 38.8,136.85 33.625,142.025 27.6,142.025 27.6,137.425 27.025,136.85 8.43,136.85 3.996,132.38 4.325,91.802 -0.125,91.802 0.002,135.025 -0.125,190.15 125.021,190.15 280.175,190.15 280.175,0.2 280.4,-0.025 125.472,-0.025 -0.025,-0.025 0.032,27.4 0.032,42.525 -0.025,91.475 34.35,91.475 34.35,53.65 24.072,53.65 24.072,42.525 98.047,42.525 98.047,33.228 103.875,27.4 119.507,27.4
GND on GND "GND" (solid, remove dead copper, pour order 1): 0,190 280,190 280,0 0,0
+3.3VB on INT2, +3.3VB "+3.3VB" (solid, remove dead copper, pour order 32): 0.025,190 0.05,189.975 278.95,189.975 278.95,59 278.95,107.275 169.55,107.275 162.975,100.7 162.975,43.25 129.15,9.425 80.95,9.425 78.025,12.35 78.025,15.75 80.6,18.325 110.7,18.325 125.225,32.85 125.225,101.25 119.2,107.275 0.025,107.275

## Keep-outs
Keep-Out Layer:
  lines w0.25: 196.5,8.525 220,8.525 220,15.45 196.5,15.45 196.5,8.525 ; 242.925,8.525 254.575,8.525 254.575,12.525 242.925,12.525 242.925,8.525

## Other copper
Top:
  text "467444.130 / 758726.458-1" at 197.5,9.225 h4
  text "1" at 243.8,9.225 h4
GND:
  text "467444.130 / 758726.458-1" at 197.5,9.225 h4
  text "2" at 245.504,9.225 h4
POWER:
  text "467444.130 / 758726.458-1" at 197.5,9.225 h4
  text "5" at 250.6,9.225 h4
INT1:
  text "467444.130 / 758726.458-1" at 197.5,9.225 h4
  text "3" at 247.2,9.225 h4
INT2, +3.3VB:
  text "467444.130 / 758726.458-1" at 197.5,9.225 h4
  text "4" at 248.9,9.225 h4
Bottom:
  text "467444.130 / 758726.458-1" at 219.5,9.225 h4
  text "6" at 253.548,9.225 h4

## Silkscreen, mask and mechanical layers (free items; w line width, h text height)
Top Overlay:
  text "467444.130 / 758726.458-1" at 197.5,9.225 h4
Bottom Overlay:
  text "467444.130 / 758726.458-1" at 219.5,9.225 h4
Board:
  the board outline again, w0.25
Plata:
  lines w0.25: 0,10 0,0 10,0 ; 0,185 10,185 ; 5,180 5,190 ; 10,5 20,5 ; 15,0 15,10 ; 135,5 145,5 ; 135,185 145,185 ; 140,0 140,10 ; 140,180 140,190 ; 260,5 270,5 ; 265,0 265,10 ; 270,185 280,185 ; 275,180 275,190 ; 10,0 10,10 20,10 20,0 10,0 ; 0,180 0,190 10,190 10,180 0,180 ; 135,0 135,10 145,10 145,0 135,0 ; 135,180 135,190 145,190 145,180 135,180 ; 260,0 260,10 270,10 270,0 260,0 ; 270,180 270,190 280,190 280,180 270,180
Drill Drawing:
  circle w0.25: c4.598,206.76 r1.714
  lines w0.25: -0.107,202.732 74.372,202.732 ; -0.107,256.723 74.372,256.723 ; 18.211,195.019 18.211,264.436 ; 38.501,195.019 38.501,264.436 ; 53.665,195.019 53.665,264.436 ; -0.107,195.019 74.372,195.019 74.372,264.436 -0.107,264.436 -0.107,195.019 ; 2.884,212.759 4.598,213.616 6.312,212.759 5.455,214.473 6.312,216.187 4.598,215.33 2.884,216.187 3.741,214.473 2.884,212.759 ; 2.884,221.329 3.741,221.329 3.741,220.472 5.455,220.472 5.455,221.329 6.312,221.329 6.312,223.043 5.455,223.043 5.455,223.9 3.741,223.9 3.741,223.043 2.884,223.043 2.884,221.329 ; 2.884,228.185 6.312,228.185 6.312,231.613 2.884,231.613 2.884,228.185 ; 2.884,239.326 6.312,239.326 4.598,235.898 2.884,239.326 ; 2.884,244.468 3.741,244.468 4.598,243.611 5.455,244.468 6.312,244.468 5.455,245.325 6.312,246.182 5.455,246.182 4.598,247.039 3.741,246.182 2.884,246.182 3.741,245.325 2.884,244.468 ; 2.884,251.324 6.312,251.324 6.312,254.752 2.884,254.752 2.884,251.324 ; 3.57,252.01 5.627,252.01 5.627,254.066 3.57,254.066 3.57,252.01
  text "Symbol" at 4.52,259.037 h4.56
  text "Hole Size" at 20.525,259.037 h4.56
  text "Plated" at 40.815,259.037 h4.56
  text "Count" at 55.979,259.037 h4.56
  text "0.30mm" at 20.525,251.324 h3.8
  text "PTH" at 40.815,251.324 h3.8
  text "42" at 55.979,251.324 h3.8
  text "0.60mm" at 20.525,243.611 h3.8
  text "PTH" at 40.815,243.611 h3.8
  text "289" at 55.979,243.611 h3.8
  text "0.90mm" at 20.525,235.898 h3.8
  text "PTH" at 40.815,235.898 h3.8
  text "197" at 55.979,235.898 h3.8
  text "1.10mm" at 20.525,228.185 h3.8
  text "PTH" at 40.815,228.185 h3.8
  text "84" at 55.979,228.185 h3.8
  text "1.30mm" at 20.525,220.472 h3.8
  text "PTH" at 40.815,220.472 h3.8
  text "18" at 55.979,220.472 h3.8
  text "3.40mm" at 20.525,212.759 h3.8
  text "NPTH" at 40.815,212.759 h3.8
  text "4" at 55.979,212.759 h3.8
  text "3.40mm" at 20.525,205.046 h3.8
  text "PTH" at 40.815,205.046 h3.8
  text "6" at 55.979,205.046 h3.8
  text "640 Total" at 55.979,197.333 h3.8

## Text inside footprints (layer, text, board x,y; h text height)
C2: Top Overlay "+" at 39.505,38.075 h6 r90
C11: Top Overlay "+" at 77.8,120.775 h8 r90
C16: Top Overlay "+" at 67.5,120.875 h8 r90
C26: Top Overlay "+" at 77.89,88.016 h8 r90
C28: Top Overlay "+" at 77.75,103.8 h8 r90
C30: Top Overlay "+" at 67.35,103.925 h8 r90
C40: Top Overlay "+" at 67.39,88.016 h8 r90
C59: Bottom Overlay "+" at 74.175,34.725 h4 r180
C62: Bottom Overlay "+" at 121.075,61.075 h8 r180
C64: Bottom Overlay "+" at 98.125,35.775 h4 r90
C66: Bottom Overlay "+" at 117.1,29.775 h4 r180
C67: Bottom Overlay "+" at 126.35,50.725 h4 r90
C86: Top Overlay "+" at 9.7,122.2 h8 r270; Bottom Overlay "+" at 9.7,118.4 h8 r270
C88: Top Overlay "+" at 19.3,120.6 h8 r270
C89: Top Overlay "+" at 7.071,96 h8
C91: Top Overlay "+" at 44.5,101.2 h8 r180
C93: Top Overlay "+" at 40.6,128.4 h8 r270
C95: Bottom Overlay "+" at 102.825,56.25 h8 r90
C96: Top Overlay "+" at 23.975,148 h8 r270
DA1: Top Overlay "1" at 79.965,94.566 h4
DA2: Top Overlay "1" at 79.975,127.325 h4
DA3: Top Overlay "1" at 79.925,110.35 h4
DA4: Bottom Overlay "1" at 81.675,21.8 h4
DA5: Bottom Overlay "5" at 147.63,43.967 h2.5; Bottom Overlay "8" at 153.805,43.992 h2.5; Bottom Overlay "1" at 152.83,35.167 h4
DA6: Bottom Overlay "5" at 170.425,44.092 h2.5; Bottom Overlay "8" at 176.625,44.092 h2.5; Bottom Overlay "1" at 175.575,35.092 h4
DA7: Top Overlay "5" at 213.075,136.075 h2.5; Top Overlay "8" at 206.875,136.075 h2.5; Top Overlay "1" at 206.975,129.575 h4
DA8: Bottom Overlay "1" at 21.6,148.5 h4; Bottom Overlay "8" at 21.625,155.1 h2.5; Bottom Overlay "5" at 15.575,155.075 h2.5
DA9: Top Overlay "1" at 189.95,129.425 h4; Top Overlay "8" at 189.775,136 h2.5; Top Overlay "5" at 196.1,135.925 h2.5
DA10: Top Overlay "1" at 37,147.1 h4; Top Overlay "8" at 37,153.6 h2.5; Top Overlay "5" at 43.2,153.6 h2.5
DA11: Top Overlay "5" at 151.13,131.975 h2.5; Top Overlay "8" at 144.88,131.975 h2.5; Top Overlay "1" at 144.975,125.225 h4
DA12: Bottom Overlay "5" at 220.375,165.35 h2.5; Bottom Overlay "8" at 226.5,165.35 h2.5; Bottom Overlay "1" at 226.5,158.6 h4
DA13: Top Overlay "5" at 110.2,143.472 h2.5; Top Overlay "8" at 104.018,143.472 h2.5; Top Overlay "1" at 104.018,136.597 h4
DA14: Top Overlay "5" at 134.725,131.95 h2.5; Top Overlay "8" at 128.473,131.95 h2.5; Top Overlay "1" at 128.473,125.2 h4
DA15: Top Overlay "1" at 57.105,140.15 h4; Top Overlay "8" at 57.105,146.9 h2.5; Top Overlay "5" at 63.225,146.9 h2.5
DA16: Top Overlay "5" at 194.825,156.275 h2.5; Top Overlay "8" at 188.643,156.275 h2.5; Top Overlay "1" at 188.643,149.55 h4
DA17: Top Overlay "1" at 77.85,140.334 h4; Top Overlay "8" at 77.85,147.084 h2.5; Top Overlay "5" at 84.025,147.084 h2.5
DA18: Top Overlay "1" at 149.72,145.6 h4; Top Overlay "8" at 149.668,152.325 h2.5; Top Overlay "5" at 155.85,152.325 h2.5
DA19: Top Overlay "5" at 134.255,152.45 h2.5; Top Overlay "8" at 128.055,152.45 h2.5; Top Overlay "1" at 128.055,145.45 h4
DA20: Top Overlay "1" at 32.5,105 h4; Top Overlay "2" at 28.854,90.675 h4
DA21: Top Overlay "1" at 9.128,129.65 h4; Top Overlay "2" at 23.932,129.725 h4
DA22: Top Overlay "1" at 41.7,118.4 h4
DA23: Top Overlay "1" at 28.075,136.6 h4
DD1: Top Overlay "109" at 67.1,68.725 h2.5; Top Overlay "73" at 68.65,44.975 h2.5; Top Overlay "37" at 47.35,43.8 h2.5; Top Overlay "1" at 44.75,64.275 h4
DD2: Top Overlay "1" at 28.55,38.075 h4
DD3: Top Overlay "5" at 30.4,59.025 h2.5; Top Overlay "8" at 35.705,56.575 h2.5; Top Overlay "1" at 36.4,64.825 h4
DD4: Top Overlay "109" at 122.675,51.725 h2.5 r90; Top Overlay "73" at 122.062,31.55 h2.5; Top Overlay "37" at 100.762,30.375 h2.5; Top Overlay "1" at 98.162,50.85 h4
DD5: Top Overlay "1" at 19.301,33.376 h4
VT1: Top Overlay "G" at 45.85,25.776 h3; Top Overlay "S" at 40.95,27.572 h3 r180; Top Overlay "D" at 39.826,23.15 h3
XP1: Top Overlay "1" at 24.94,49.661 h4; Top Overlay "2" at 17.44,49.561 h4; Bottom Overlay "2" at 19.14,50.16 h2.5; Bottom Overlay "1" at 24.81,50.154 h2.5; Bottom Overlay "9" at 25.12,60.32 h2.5; Bottom Overlay "10" at 19.142,60.314 h2.5
XP2: Top Overlay "1" at 102.545,69.525 h4; Bottom Overlay "6" at 121.545,69.925 h2.5; Bottom Overlay "1" at 105.295,69.925 h2.5
XP3: Top Overlay "2" at 131.7,49.748 h4; Top Overlay "1" at 143.5,49.739 h4; Bottom Overlay "13" at 140.406,100.748 h2.5; Bottom Overlay "14" at 137.948,100.83 h2.5; Bottom Overlay "2" at 137.37,47.966 h2.5; Bottom Overlay "1" at 139.858,47.955 h2.5
XP4: Top Overlay "1" at 58.2,173.3 h4; Top Overlay "2" at 58.204,170.4 h4; Bottom Overlay "1" at 54.78,173.213 h2.5; Bottom Overlay "2" at 55.094,171.219 h2.5; Bottom Overlay "40" at 13.52,171.219 h2.5; Bottom Overlay "39" at 13.52,173.219 h2.5
XP5: Top Overlay "2" at 97.804,157.3 h4; Top Overlay "1" at 97.8,160.2 h4; Bottom Overlay "39" at 53.12,160.219 h2.5; Bottom Overlay "40" at 53.12,158.219 h2.5; Bottom Overlay "2" at 94.694,158.219 h2.5; Bottom Overlay "1" at 94.38,160.213 h2.5
XP6: Top Overlay "2" at 174.945,179.725 h4; Top Overlay "1" at 175.448,176.8 h4; Bottom Overlay "19" at 198.54,178.22 h2.5; Bottom Overlay "20" at 198.859,180.33 h2.5; Bottom Overlay "2" at 176.34,180.33 h2.5; Bottom Overlay "1" at 176.29,178.22 h2.5
XP7: Top Overlay "1" at 135.3,173.3 h4; Top Overlay "2" at 135.304,170.4 h4; Bottom Overlay "1" at 131.68,173.213 h2.5; Bottom Overlay "2" at 131.994,171.219 h2.5; Bottom Overlay "40" at 90.42,171.219 h2.5; Bottom Overlay "39" at 90.42,173.219 h2.5
XP8: Top Overlay "1" at 16.898,25.25 h4; Bottom Overlay "6" at 35.51,25.719 h2.5; Bottom Overlay "1" at 19.65,25.713 h2.5
XP9: Top Overlay "1" at 5.17,102.3 h4; Bottom Overlay "1" at 7.92,102.7 h2.5; Bottom Overlay "4" at 19.38,102.7 h2.5
XP10: Top Overlay "2" at 207.745,179.725 h4; Top Overlay "1" at 208.248,176.8 h4; Bottom Overlay "19" at 231.34,178.22 h2.5; Bottom Overlay "20" at 231.659,180.33 h2.5; Bottom Overlay "2" at 209.14,180.33 h2.5; Bottom Overlay "1" at 209.09,178.22 h2.5
XP11: Top Overlay "1" at 66.708,11.6 h4; Bottom Overlay "6" at 85.32,12.069 h2.5; Bottom Overlay "1" at 69.46,12.063 h2.5
XP12: Top Overlay "2" at 240.545,179.725 h4; Top Overlay "1" at 241.048,176.8 h4; Bottom Overlay "19" at 264.14,178.22 h2.5; Bottom Overlay "20" at 264.459,180.33 h2.5; Bottom Overlay "2" at 241.94,180.33 h2.5; Bottom Overlay "1" at 241.89,178.22 h2.5
XP13: Top Overlay "2" at 152.245,179.725 h4; Top Overlay "1" at 152.748,176.8 h4; Bottom Overlay "9" at 165.06,178.22 h2.5; Bottom Overlay "10" at 165.84,180.33 h2.5; Bottom Overlay "2" at 153.64,180.33 h2.5; Bottom Overlay "1" at 153.59,178.22 h2.5
XP14: Top Overlay "1" at 41.708,11.6 h4; Bottom Overlay "6" at 60.32,12.069 h2.5; Bottom Overlay "1" at 44.46,12.063 h2.5
XP15: Top Overlay "1" at 16.898,11.6 h4; Bottom Overlay "1" at 19.65,12.063 h2.5; Bottom Overlay "6" at 35.51,12.069 h2.5
ZQ1: Bottom Overlay "1" at 109,38.65 h2.5